# Altium PCB FEU-102-1_part0.PcbDoc
Units mm, origin at the board's own origin, x right, y up, seen from the top; angles counter-clockwise.
Board outline 20 x 20 mm, 2 copper layers (Top Layer, Bottom Layer), stack 1.021 mm thick; 1 components, 14 nets, 14 pads, 0 vias.
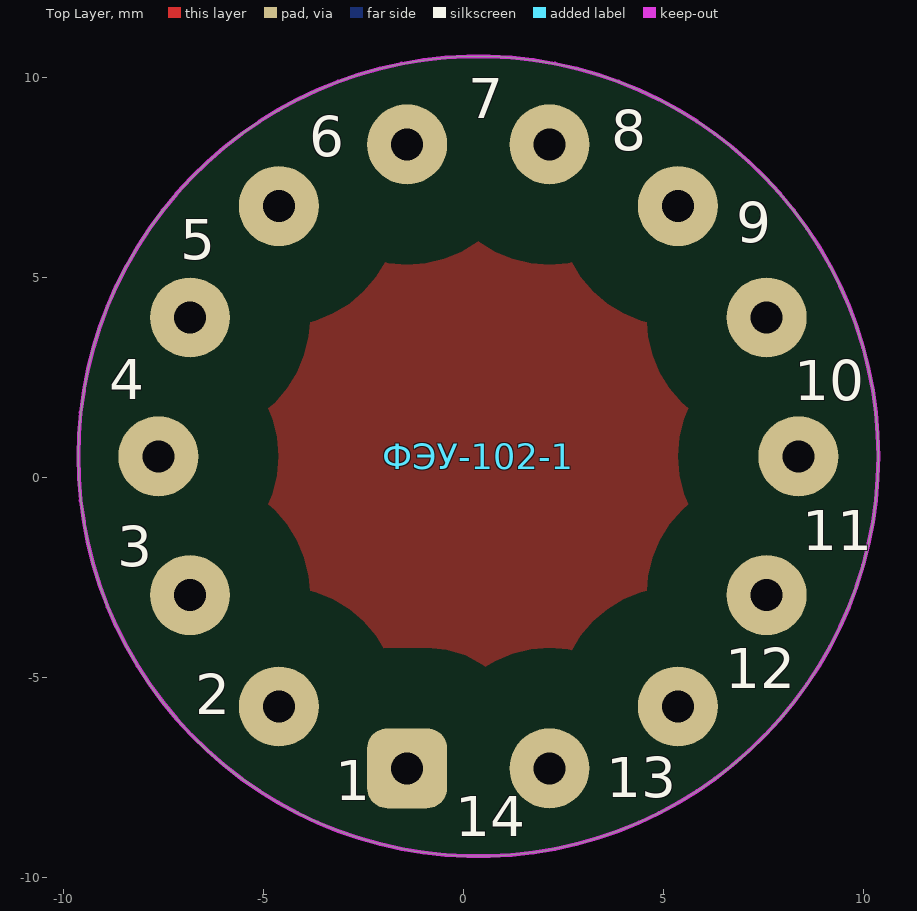
[diagram p0: Top Layer view]
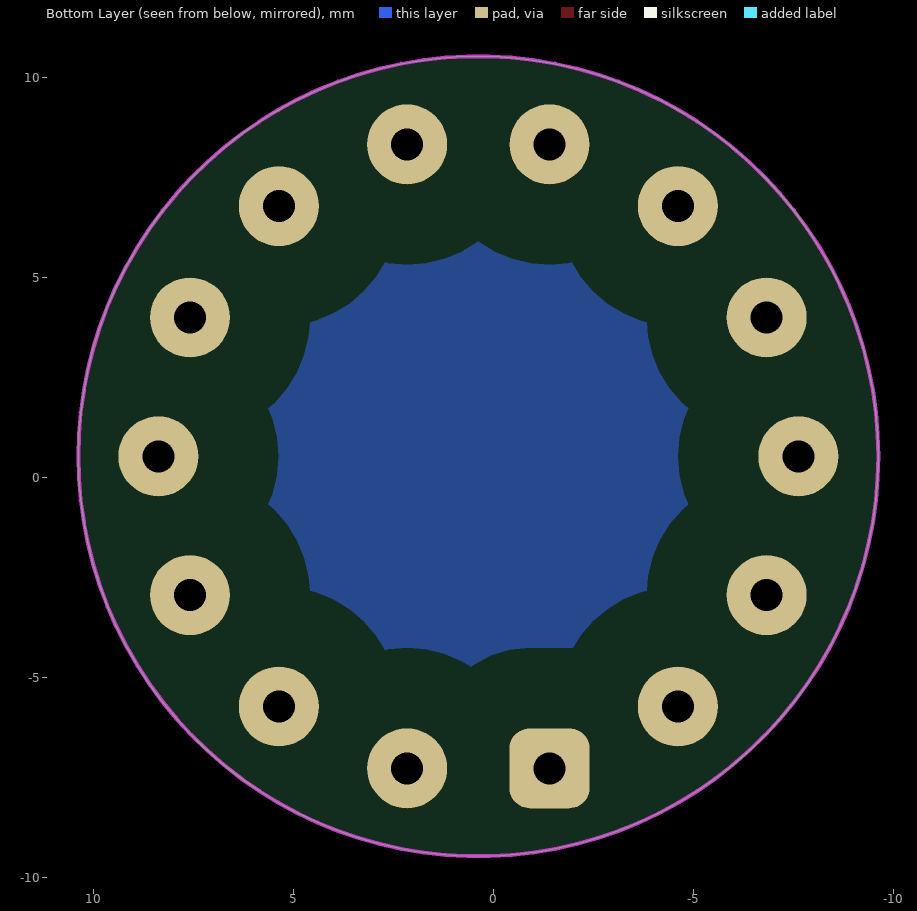
[diagram p1: Bottom Layer view, seen from below]

## Layer stack, top to bottom
Top Solder: solder mask 0.0102, Solder Resist, Dk 3.5
Top Layer: signal copper 0.0356
Dielectric1: dielectric 0.95, FR-4, Dk 4.8
Bottom Layer: signal copper 0.0356
Bottom Solder: solder mask 0.0102, Solder Resist, Dk 3.5

## Board outline
-9.62,0.526 ccw(c0.38,0.526) 0.38,-9.474 ccw(c0.38,0.526) 10.38,0.526 ccw(c0.38,0.526) 0.38,10.526 ccw(c0.38,0.526)

## Design rules (kind name [scope] priority, off if disabled: settings)
Clearance [All] p1: gap=2
ComponentClearance [All] p1: gap=0.1 collisioncheckmode=3 verticalgap=0.254 showdistances=TRUE
HoleSize [All] p1: absolutevalues=TRUE maxlimit=2.54 minlimit=0.3 maxpercent=80.000 minpercent=20.000
HoleToHoleClearance [All] p1: gap=0.152 allowstackedmicrovias=TRUE
MinimumAnnularRing [All] p1: minimumring=0.2
MinimumSolderMaskSliver [All] p1: minsoldermaskwidth=0.152
PlaneClearance [All] p1: clearance=2
PlaneConnect [All] p1: planeconnectstyle=Relief reliefexpansion=0.457 reliefentries=4 reliefconductorwidth=0.3 reliefairgap=0.457
PolygonConnect PolygonConnect_via [IsVia] p1: connectstyle=Direct reliefconductorwidth=0.254 reliefentries=4 polygonreliefangle="90 Angle" airgapwidth=0.254
PolygonConnect [All] p2: connectstyle=Relief reliefconductorwidth=0.254 reliefentries=4 polygonreliefangle="90 Angle" airgapwidth=0.254
RoutingVias [All] p1: holewidth=0.3 width=0.62 viastyle="Through Hole" minholewidth=0.3 minwidth=0.62 maxholewidth=6 maxwidth=4
SilkToSilkClearance [All] p1: silktosilkclearance=0.152
SilkToSolderMaskClearance SilkscreenOverComponentPads [IsPad] p1: minsilkscreentomaskgap=0.1 clearancetoexposedcopper=TRUE
SolderMaskExpansion [All] p1: expansion=0.1
Width [All] p1: maxlimit=2.254 minlimit=0.4 preferedwidth=0.4
22 further rules are at their usual default settings.

## Components (designator, comment, footprint, x,y, rotation, side; value= is the part's Value field where it differs from the comment)
ФЭУ-102-1 "Header 7X2" ФЭУ-102 0.38,0.526 r0 top locked

## Footprints (in the part's own frame and the unit in brackets; to place one, negate y for a bottom-side part, rotate by r counter-clockwise, add the part's x,y. Pads: shape width x height; smd on the part's side, far side on the other; paste and mask are expansions set on the pad)
ФЭУ-102 [mm]
  rrect50% 2x2 hole 0.8: 1(-1.78,-7.799)
  round 2 hole 0.8: 2(-4.988,-6.255) 3(-7.208,-3.471) 4(-8,0) 5(-7.208,3.471) 6(-4.988,6.255) 7(-1.78,7.799) 8(1.78,7.799) 9(4.988,6.255) 10(7.208,3.471) 11(8,0) 12(7.208,-3.471) 13(4.988,-6.255) 14(1.78,-7.799)
  Keep-Out Layer circle w0.1: c0,0 r10

## Part data
ФЭУ-102-1: "Header, 7-Pin, Dual row"

## Nets (pads, with @x,y where several pads share a name; then routed paths per layer and width w, separated by ;. In a path a pad name is that pad's centre, name@x,y a point inside that pad or via, vN(x,y) a via of type N, cw(c..) or ccw(c..) an arc to the next point about the centre after c; other vN are vias at no path point)
ANODE: ФЭУ-102-1.9
DINODE1: ФЭУ-102-1.14
DINODE2: ФЭУ-102-1.2
DINODE3: ФЭУ-102-1.13
DINODE4: ФЭУ-102-1.3
DINODE5: ФЭУ-102-1.12
DINODE6: ФЭУ-102-1.4
DINODE7: ФЭУ-102-1.11
DINODE8: ФЭУ-102-1.5
DINODE9: ФЭУ-102-1.10
DINODE10: ФЭУ-102-1.6
DINODE11: ФЭУ-102-1.7
DINODE12: ФЭУ-102-1.8
FOTOKAT: ФЭУ-102-1.1

## Polygon pours and split planes (outlines as drawn)
no net on Bottom Layer "Bottom Layer-No Net" (solid, pour order 4): 3.475,8.9 ccw(c3.15,8.9) 3.15,9.225 -2.95,9.225 -3.275,9.225 ccw(c-3.275,6.775) -5.725,6.775 ccw(c-5.725,5.025) -7.475,5.025 -7.475,-4 -7.475,-4.36 ccw(c-4.935,-4.36) -4.935,-6.9 -1.575,-6.9 5.815,-6.9 ccw(c5.815,-4.36) 8.355,-4.36 8.355,0.476 8.355,5.71 ccw(c5.815,5.71) 5.815,8.25 4.75,8.25
no net on Top Layer "Bottom Layer-No Net" (solid, pour order 2): -2.57,8.95 cw(c-2.245,8.95) -2.245,9.275 3.855,9.275 4.18,9.275 cw(c4.18,6.825) 6.63,6.825 cw(c6.63,5.075) 8.38,5.075 8.38,-3.95 8.38,-4.31 cw(c5.84,-4.31) 5.84,-6.85 2.48,-6.85 -4.91,-6.85 cw(c-4.91,-4.31) -7.45,-4.31 -7.45,0.526 -7.45,5.76 cw(c-4.91,5.76) -4.91,8.3 -3.845,8.3

## Silkscreen, mask and mechanical layers (free items; w line width, h text height)
Top Overlay:
  text "7" at 0.125,8.975 h1
  text "8" at 3.7,8.175 h1
  text "6" at -3.85,8.025 h1
  text "9" at 6.825,5.875 h1
  text "5" at -7.075,5.45 h1
  text "4" at -8.85,1.95 h1
  text "10" at 8.275,1.925 h1
  text "11" at 8.475,-1.825 h1
  text "3" at -8.65,-2.225 h1
  text "12" at 6.55,-5.275 h1
  text "2" at -6.7,-5.925 h1
  text "13" at 3.575,-8 h1
  text "1" at -3.2,-8.075 h1
  text "14" at -0.2,-8.975 h1